# EAGLE board waga_can (EAGLE 7.7.0)
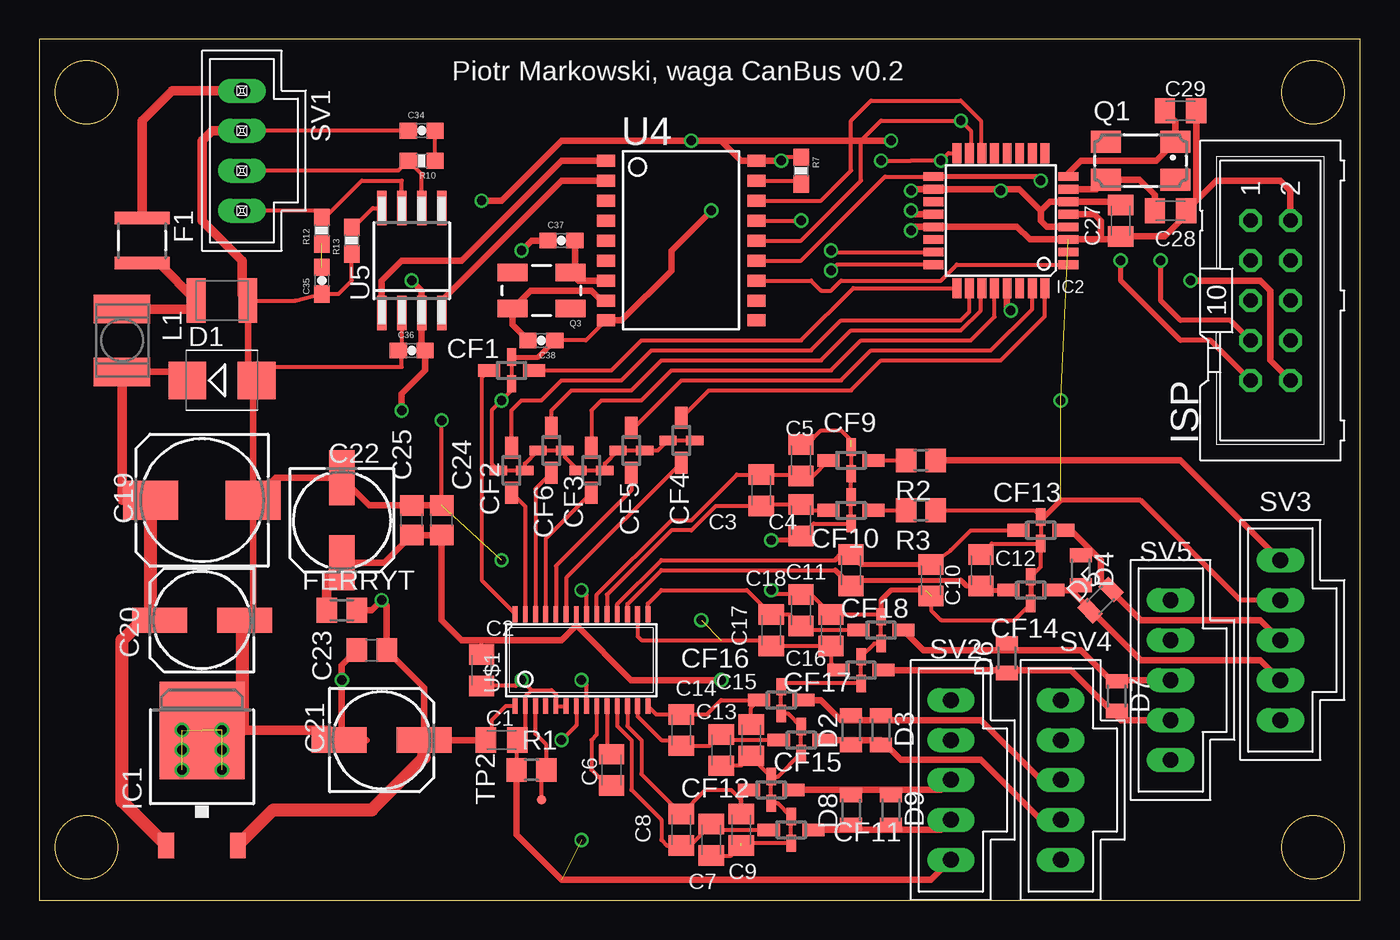
[diagram p0: board, top side]
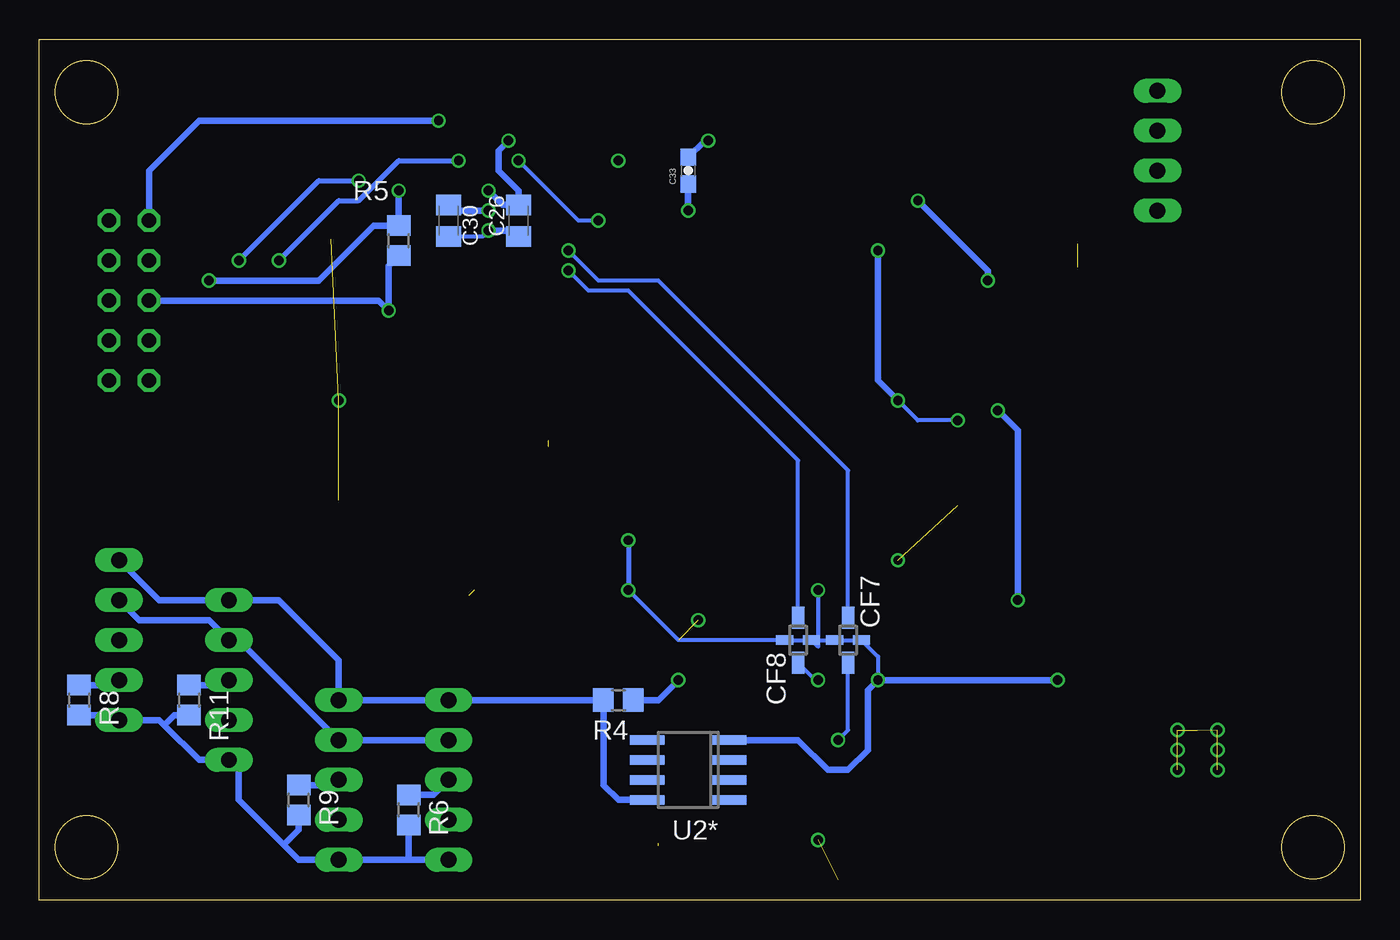
[diagram p1: board, bottom side, seen from below]

Size 84 x 54.73 mm. Coordinates in mm from the lower left corner, seen from the top.
Outline: 84,54.73 0,54.73 0,0 84,0 84,54.73
Outline: circle at 3,3.37 radius 2
Outline: circle at 81,51.37 radius 2
Outline: circle at 3,51.37 radius 2
Outline: circle at 81,3.37 radius 2
Copper layers (1*16): Top 0.035mm / dielectric 1.5mm / Bottom 0.035mm
Design rules "NOA Eagle Rule 2016-06-12": minimum track width 6mil, minimum drill 0.3mm, track to track 6mil, track to pad 6mil, pad to pad 6mil, via to via 6mil, smd to smd 0mil, copper to edge 0.4mm, drill to drill 10mil, minimum pad ring 10mil, minimum via ring 6mil, stop-mask expansion 2mil, vias tented up to drill 25mil, thermal gap 10mil

## Footprints (pad centres in the part's own frame; a part is rotated, then mirrored left to right if it is on the bottom)
CT/CN1210 = smd 1.2 x 2.8: 1 -1.65,0; 2 1.65,0
C0805K = smd 1.3 x 1.6: 1 -1,0; 2 1,0
153CLV-0810 = smd 3.5 x 2.5: + 3.25,0; - -3.25,0
153CLV-0605 = smd 3.5 x 1.6: + 2.7,0; - -2.7,0
C0805 = smd 1.3 x 1.5: 1 -0.95,0; 2 0.95,0
0603-CAP = smd 1.1 x 1: 1 -0.85,0; 2 0.85,0
NFM21C = smd 1.4 x 0.8: 1 -1.425,0; 3 1.425,0 | smd 0.6 x 1.1: 2@1 0,-0.85; 2@2 0,0.85
SMB = smd 2.4 x 2.4: A 2.2,0; C -2.2,0
MICROMELF-W = smd 0.9 x 1.4: A 0.95,0; C -0.95,0
1812X7R = smd 0.8 x 3.5: 1 -1.425,0; 2 1.425,0
M0805 = smd 1.3 x 1.6: 1 -0.95,0; 2 0.95,0
TO252 = smd 1 x 1.6: 1 -2.28,-4.8; 2 2.28,-4.8 | smd 5.4 x 6.2: 3 0,2.5
TQFP32-08 = smd 1.27 x 0.559: 1 -4.293,2.8; 2 -4.293,2; 3 -4.293,1.2; 4 -4.293,0.4; 5 -4.293,-0.4; 6 -4.293,-1.2; 7 -4.293,-2; 8 -4.293,-2.8; 17 4.293,-2.8; 18 4.293,-2; 19 4.293,-1.2; 20 4.293,-0.4; 21 4.293,0.4; 22 4.293,1.2; 23 4.293,2; 24 4.293,2.8 | smd 0.559 x 1.27: 9 -2.8,-4.293; 10 -2,-4.293; 11 -1.2,-4.293; 12 -0.4,-4.293; 13 0.4,-4.293; 14 1.2,-4.293; 15 2,-4.293; 16 2.8,-4.293; 25 2.8,4.293; 26 2,4.293; 27 1.2,4.293; 28 0.4,4.293; 29 -0.4,4.293; 30 -1.2,4.293; 31 -2,4.293; 32 -2.8,4.293
ML10 = drill 0.914 octagon: 1 -5.08,-1.27; 2 -5.08,1.27; 3 -2.54,-1.27; 4 -2.54,1.27; 5 0,-1.27; 6 0,1.27; 7 2.54,-1.27; 8 2.54,1.27; 9 5.08,-1.27; 10 5.08,1.27
L4532P = smd 1.8 x 3.6: 1 -2,0; 2 2,0
CTS406 = smd 1.9 x 1.4: 1 -2.2,-1.2; 2 2.2,-1.2; 3 2.2,1.2; 4 -2.2,1.2
CRYSTAL-SMD-5X3 = smd 1.9 x 1.1: 1 -1.85,-1.15; 2 1.85,-1.15; 3 1.85,1.15; 4 -1.85,1.15
R0805 = smd 1.3 x 1.5: 1 -0.95,0; 2 0.95,0
0603-RES = smd 1.1 x 1: 1 -0.85,0; 2 0.85,0
70543-0038 = drill 1.016 long: 1 -3.81,0; 2 -1.27,0; 3 1.27,0; 4 3.81,0
70543-0004 = drill 1.016 long: 1 -5.08,0; 2 -2.54,0; 3 0,0; 4 2.54,0; 5 5.08,0
TP06R = smd 0.6 x 0.6: TP 0,0
SO8 = smd 0.6 x 2.2: 1 -1.905,-2.6; 2 -0.635,-2.6; 3 0.635,-2.6; 4 1.905,-2.6; 5 1.905,2.6; 6 0.635,2.6; 7 -0.635,2.6; 8 -1.905,2.6
SO-18W = smd 0.762 x 1.143: 1 -5.08,-4.788; 2 -3.81,-4.788; 3 -2.54,-4.788; 4 -1.27,-4.788; 5 0,-4.788; 6 1.27,-4.788; 7 2.54,-4.788; 8 3.81,-4.788; 9 5.08,-4.788; 10 5.08,4.788; 11 3.81,4.788; 12 2.54,4.788; 13 1.27,4.788; 14 0,4.788; 15 -1.27,4.788; 16 -2.54,4.788; 17 -3.81,4.788; 18 -5.08,4.788
SO-08M = smd 0.6 x 2.2: 1 -1.905,-3.33; 2 -0.635,-3.33; 3 0.635,-3.33; 4 1.905,-3.33; 5 1.905,3.33; 6 0.635,3.33; 7 -0.635,3.33; 8 -1.905,3.33
TSSOP-28 = smd 0.305 x 0.991: 1 -4.225,-2.918; 2 -3.575,-2.918; 3 -2.925,-2.918; 4 -2.275,-2.918; 5 -1.625,-2.918; 6 -0.975,-2.918; 7 -0.325,-2.918; 8 0.325,-2.918; 9 0.975,-2.918; 10 1.625,-2.918; 11 2.275,-2.918; 12 2.925,-2.918; 13 3.575,-2.918; 14 4.225,-2.918; 15 4.225,2.918; 16 3.575,2.918; 17 2.925,2.918; 18 2.275,2.918; 19 1.625,2.918; 20 0.975,2.918; 21 0.325,2.918; 22 -0.325,2.918; 23 -0.975,2.918; 24 -1.625,2.918; 25 -2.275,2.918; 26 -2.925,2.918; 27 -3.575,2.918; 28 -4.225,2.918

## Placement (x,y rotation side)
B72530T300K62  VARISTORCN1210  [CT/CN1210]  11.62,38.13 0 top
C1  2.2uF  [C0805K]  29.4,10.19 0 top
C2  2.2uF  [C0805K]  28.13,14.63 270 top
C3  2.2uF  [C0805K]  45.91,26.06 90 top
C4  100pF  [C0805K]  48.45,24.16 90 top
C5  100pF  [C0805K]  48.45,27.97 270 top
C6  100pF  [C0805K]  36.38,8.28 90 top
C7  100pF  [C0805K]  42.73,3.84 90 top
C8  2.2uF  [C0805K]  40.83,4.47 270 top
C9  100pF  [C0805K]  44.64,4.47 90 top
C10  100pF  [C0805K]  56.7,20.35 90 top
C11  2.2uF  [C0805K]  51.62,20.98 90 top
C12  100pF  [C0805K]  59.88,20.98 270 top
C13  100pF  [C0805K]  43.37,9.55 90 top
C14  2.2uF  [C0805K]  40.83,10.82 270 top
C15  100pF  [C0805K]  45.27,10.19 90 top
C16  100pF  [C0805K]  50.35,17.17 270 top
C17  2.2uF  [C0805K]  46.54,17.17 270 top
C18  100pF  [C0805K]  48.45,18.44 270 top
C19  100uF  [153CLV-0810]  10.35,25.43 180 top
C20  10uF  [153CLV-0605]  10.35,17.81 180 top
C21  10uF  [153CLV-0605]  21.78,10.19 0 top
C22  10uF  [153CLV-0605]  19.24,24.16 270 top
C23  10pF  [C0805]  21.14,15.9 180 top
C24  100pF  [C0805]  25.59,24.16 90 top
C25  10pF  [C0805]  23.68,24.16 90 top
C26  100pF  [C0805K]  53.53,43.21 90 bottom
C27  100pF  [C0805K]  68.77,43.21 270 top
C28  20pF  [C0805K]  71.94,43.84 0 top
C29  20pF  [C0805K]  72.58,50.19 0 top
C30  100nF  [C0805K]  57.97,43.21 270 bottom
C33  0.1uF  [0603-CAP]  42.73,46.38 90 bottom
C34  560pF  [0603-CAP]  24.32,48.92 0 top
C35  560pF  [0603-CAP]  17.97,39.4 90 top
C36  0.1uF  [0603-CAP]  23.68,34.95 0 top
C37  22pF  [0603-CAP]  33.21,41.94 0 top
C38  22pF  [0603-CAP]  31.94,35.59 180 top
CF1  NFM21C  [NFM21C]  30.03,33.68 180 top
CF2  NFM21C  [NFM21C]  30.03,27.33 270 top
CF3  NFM21C  [NFM21C]  35.11,27.33 270 top
CF4  NFM21C  [NFM21C]  40.83,29.24 270 top
CF5  NFM21C  [NFM21C]  37.65,28.6 270 top
CF6  NFM21C  [NFM21C]  32.57,28.6 270 top
CF7  NFM21C  [NFM21C]  32.57,16.54 270 bottom
CF8  NFM21C  [NFM21C]  35.75,16.54 270 bottom
CF9  NFM21C  [NFM21C]  51.62,27.97 0 top
CF10  NFM21C  [NFM21C]  51.62,24.79 180 top
CF11  NFM21C  [NFM21C]  47.81,4.47 0 top
CF12  NFM21C  [NFM21C]  46.54,7.01 180 top
CF13  NFM21C  [NFM21C]  63.69,23.52 0 top
CF14  NFM21C  [NFM21C]  63.05,19.71 180 top
CF15  NFM21C  [NFM21C]  48.45,10.19 0 top
CF16  NFM21C  [NFM21C]  47.18,12.73 180 top
CF17  NFM21C  [NFM21C]  52.26,14.63 0 top
CF18  NFM21C  [NFM21C]  53.53,17.17 180 top
D1  [SMB]  11.62,33.05 0 top
D2  [MICROMELF-W]  51.62,10.82 90 top
D3  [MICROMELF-W]  53.53,10.82 270 top
D4  [MICROMELF-W]  66.23,20.98 270 top
D5  [MICROMELF-W]  67.5,19.08 45 top
D6  [MICROMELF-W]  61.53,15.39 90 top
D7  [MICROMELF-W]  68.51,12.98 270 top
D8  [MICROMELF-W]  51.62,5.74 90 top
D9  [MICROMELF-W]  54.16,5.74 270 top
F1  [1812X7R]  6.54,41.94 270 top
FERRYT  [M0805]  19.24,18.44 180 top
IC1  7812DT  [TO252]  10.35,8.28 0 top
IC2  MEGA8-AI  [TQFP32-08]  61.15,43.21 180 top
ISP  [ML10]  78.29,38.13 270 top
L1  82uH  [L4532P]  5.27,35.59 270 top
Q1  [CTS406]  70.04,47.02 180 top
Q3  16MHz  [CRYSTAL-SMD-5X3]  31.94,38.76 180 top
R1  47k  [R0805]  31.3,8.28 0 top
R2  100  [R0805]  56.07,27.97 180 top
R3  100  [R0805]  56.07,24.79 180 top
R4  0/50k*  [R0805]  47.18,12.73 180 bottom
R5  10k  [R0805]  61.15,41.94 270 bottom
R6  0R*  [R0805]  60.51,5.74 270 bottom
R7  4.7k  [0603-RES]  48.45,46.38 270 top
R8  0R*  [R0805]  81.47,12.73 270 bottom
R9  0R*  [R0805]  67.5,6.38 270 bottom
R10  100  [0603-RES]  24.32,47.02 180 top
R11  0R*  [R0805]  74.48,12.73 270 bottom
R12  100  [0603-RES]  17.97,42.57 90 top
R13  4.7k  [0603-RES]  19.87,41.94 90 top
SV1  70543-0038  [70543-0038]  12.89,47.65 270 top
SV2  70543-0004  [70543-0004]  57.97,7.65 270 top
SV3  70543-0004  [70543-0004]  78.93,16.54 270 top
SV4  70543-0004  [70543-0004]  64.96,7.65 270 top
SV5  70543-0004  [70543-0004]  71.94,14 270 top
TP2  TPTP06R  [TP06R]  31.94,6.38 90 top
U2*  REF1004  [SO8]  42.73,8.28 90 bottom
U4  MCP2515  [SO-18W]  40.83,41.94 270 top
U5  MCP2551  [SO-08M]  23.68,40.67 0 top
U$1  ADS1234  [TSSOP-28]  34.48,15.27 0 top

## Library data of the parts
B72530T300K62 = varistor
C1-C30 F1 FERRYT L1 R1-R6 R8 R9 R11 = rcl
C33-C38 Q3 R7 R10 R12 R13 = SparkFun
CF1-CF18 = murata-filter; MPN: NFM21CC102R1H3D; OC_FARNELL: 1828795; OC_NEWARK: 84R0165
D1-D9 = diode
IC1 = linear
IC2 = atmel; MPN: ATMEGA8-16AU; OC_FARNELL: 9171371; OC_NEWARK: 73M8863
ISP = con-ml; OC_FARNELL: unknown; OC_NEWARK: unknown
Q1 = crystal; OC_FARNELL: unknown; OC_NEWARK: unknown
SV1-SV5 = molex-con
TP2 = testpad
U2* = ti_ref
U4 = microchip_can
U5 = skpang_lib
U$1 = TI-ads1234

## Nets
+5V: C2.1 C22.+ C24.1 C25.1 FERRYT.2 R4.1 U$1.22
+24V: F1.1 SV1.1
A0: CF8.3 U$1.8
A1: CF6.3 U$1.26
A1N: CF12.1 D8.A D9.C R6.1 SV2.3
A1P: CF11.3 D8.C D9.A SV2.4
A2N: CF14.1 D4.A D5.C R8.1 SV3.4
A2P: CF13.3 D4.C D5.A SV3.3
A3N: CF16.1 D2.A D3.C R9.1 SV4.3
A3P: CF15.3 D2.C D3.A SV4.4
A4N: CF18.1 D6.A D7.C R11.1 SV5.3
A4P: CF17.3 D6.C D7.A SV5.4
CAN_CS: IC2.14 U4.16
CAN_INT: IC2.1 U4.12
CAN_RXD: U4.2 U5.4
CAN_TXD: U4.1 U5.1
CANH: R12.2 SV1.4 U5.7
CANL: R10.2 SV1.3 U5.6
DOUT: CF1.3 U$1.28
F_A0: CF8.1 IC2.24
F_A1: CF7.1 IC2.23
F_DOUT: CF1.1 IC2.25
F_GAIN0: CF4.1 IC2.32
F_GAIN1: CF5.1 IC2.31
F_PDWN: CF6.1 IC2.27
F_SCLK: CF2.1 IC2.26
F_SPEED: CF3.1 IC2.28
GAIN0: CF4.3 U$1.23
GAIN1: CF5.3 U$1.24
GND: B72530T300K62.2 C1.2 C2.2 C4.1 C5.1 C7.1 C9.1 C10.1 C12.1 C13.1 C15.1 C16.1 C18.1 C19.- C20.- C21.- C22.- C23.2 C24.2 C25.2 C26.1 C27.2 C28.2 C29.2 C30.2 C33.1 C34.1 C35.1 C36.1 C37.1 C38.1 CF1.2@1 CF1.2@2 CF2.2@1 CF2.2@2 CF3.2@1 CF3.2@2 CF4.2@1 CF4.2@2 CF5.2@1 CF5.2@2 CF6.2@1 CF6.2@2 CF7.2@1 CF7.2@2 CF8.2@1 CF8.2@2 CF9.2@1 CF9.2@2 CF10.2@1 CF10.2@2 CF11.2@1 CF11.2@2 CF12.2@1 CF12.2@2 CF13.2@1 CF13.2@2 CF14.2@1 CF14.2@2 CF15.2@1 CF15.2@2 CF16.2@1 CF16.2@2 CF17.2@1 CF17.2@2 CF18.2@1 CF18.2@2 D1.A IC1.3 IC2.3 IC2.5 IC2.21 ISP.2 R1.1 R3.1 R6.2 R8.2 R9.2 R11.2 R13.1 SV1.2 SV2.2 SV2.5 SV3.2 SV3.5 SV4.2 SV4.5 SV5.2 SV5.5 U2*.4 U4.9 U5.2 U$1.2 U$1.5 U$1.6 U$1.21
MISO: IC2.16 ISP.9 U4.15
MOSI: IC2.15 ISP.1 U4.14
N$1: C19.+ C20.+ D1.C IC1.1 L1.2
N$2: B72530T300K62.1 F1.2 L1.1
N$3: C30.1 IC2.20
N$5: C34.2 R10.1
N$7: CF7.3 U$1.7
N$8: C28.1 IC2.7 Q1.3
N$9: R1.2 TP2.TP U$1.3
N$10: C29.1 IC2.8 Q1.1
N$11: C3.2 C5.2 CF9.1 U$1.20
N$12: C3.1 C4.2 CF10.3 U$1.19
N$14: C14.1 C15.2 CF16.3 U$1.14
N$15: CF9.3 R2.2
N$16: CF10.1 R3.2
N$17: C6.2 U$1.10
N$18: C6.1 U$1.9
N$19: C35.2 R12.1
N$21: C7.2 C8.2 CF11.1 U$1.11
N$22: C8.1 C9.2 CF12.3 U$1.12
N$23: C10.2 C11.2 CF13.1 U$1.18
N$24: C11.1 C12.2 CF14.3 U$1.17
N$25: R13.2 U5.8
N$27: C13.2 C14.2 CF15.1 U$1.13
N$29: C38.2 Q3.3 U4.8
N$31: C37.2 Q3.1 U4.7
N$35: C16.2 C17.2 CF17.1 U$1.16
N$37: C17.1 C18.2 CF18.3 U$1.15
RS: R7.2 U4.17
RST: IC2.29 ISP.5 R5.2
SCK: IC2.17 ISP.7 U4.13
SCLK: CF2.3 U$1.27
SPEED: CF3.3 U$1.25
VDD: C1.1 C21.+ C23.1 C26.2 C27.1 C33.2 C36.2 FERRYT.1 IC1.2 IC2.4 IC2.6 IC2.18 ISP.10 R5.1 R7.1 U4.18 U5.3 U$1.1
VOUT: R2.1 R4.2 SV2.1 SV3.1 SV4.1 SV5.1 U2*.8

## Tracks (layer width: path | path; a pad name or v marks a point on that pad's centre or on a via)
+5V  (via drill 0.6)
  Top 0.254: 34.15,17.48 U$1.22 | C2.1 28.13,16.54
  Top 0.406: v43.37,14 37.64,14 34.15,17.48 33.21,16.54 28.13,16.54 26.86,16.54 25.59,17.81 C24.1 C25.1 21.93,21.46 C22.+
  Top 0.61: FERRYT.2 18.29,20.51 C22.+
  Bottom 0.406: v43.37,14 44.64,12.73 R4.1
+24V
  Top 0.61: SV1.1 8.44,51.46 6.54,49.56 F1.1
A0  (via drill 0.6)
  Top 0.254: U$1.8 34.8,13.67 v34.48,14
  Bottom 0.254: v34.48,14 34.63,14 CF8.3
A1
  Top 0.254: CF6.3 31.55,26.16 U$1.26
A1N
  Top 0.254: CF12.1 47.97,6.86
  Top 0.406: CF12.1 51.62,7.01 | 51.62,7.01 54.16,7.01 | 54.16,7.01 57.34,7.01 SV2.3 | D8.A 51.62,7.01 | D9.C 54.16,7.01
  Bottom 0.406: R6.1 58.93,6.69 SV2.3
A1P
  Top 0.406: CF11.3 51.62,4.47 | 51.62,4.47 54.16,4.47 | 54.16,4.47 57.34,4.47 SV2.4 | 53.99,4.64 54.16,4.47 | 51.79,4.64 51.62,4.47 | D9.A 54.16,4.47 | D8.C 51.62,4.47
A2N
  Top 0.406: SV3.4 77.66,15.27 70.04,15.27 66.86,18.44 | 66.86,18.44 65.59,19.71 | 65.59,19.71 CF14.1 | D4.A 65.91,20.03 65.59,19.71 | D5.C 66.86,18.44
  Bottom 0.406: R8.1 79.25,13.68 SV3.4
A2P
  Top 0.406: SV3.3 77.66,17.81 70.04,17.81 68.77,19.08 68.17,19.67 | 68.17,19.67 67.5,20.35 67.5,21.62 66.86,22.25 | 66.86,22.25 65.59,23.52 CF13.3 | D4.C 66.54,21.93 66.86,22.25 | D5.A 68.17,19.67
A3N
  Top 0.406: CF16.1 49.72,12.73 50.99,11.46 51.37,11.46 | 51.37,11.46 53.4,11.46 | 53.4,11.46 59.88,11.46 63.69,7.65 SV4.3 | D2.A 51.62,11.71 51.37,11.46 | D3.C 53.53,11.58 53.4,11.46
  Bottom 0.406: R9.1 65.28,7.33 SV4.3
A3P
  Top 0.254: CF15.3 49.87,10.03
  Top 0.406: CF15.3 51.49,10.19 | 51.49,10.19 53.53,10.19 53.84,9.87 | 53.84,9.87 54.8,8.92 59.88,8.92 63.69,5.11 SV4.4 | D3.A 53.84,9.87 | D2.C 51.62,10.06 51.49,10.19
A4N
  Top 0.406: CF18.1 56.22,15.9 61.78,15.9 | 61.78,15.9 66.23,15.9 68.13,14 68.77,14 | 68.77,14 SV5.3 | D7.C 68.7,13.93 68.77,14 | D6.A 61.53,16.15 61.78,15.9
  Bottom 0.406: R11.1 72.26,13.68 SV5.3
A4P
  Top 0.254: CF17.3 53.68,14.48
  Top 0.406: CF17.3 61.78,14.63 | 61.78,14.63 65.59,14.63 68.19,12.03 | 68.19,12.03 68.77,11.46 SV5.4 | D7.A 68.19,12.03 | D6.C 61.59,14.44 61.78,14.63
CAN_CS
  Top 0.254: U4.16 49.72,44.48 51.62,46.38 51.62,49.56 52.89,50.83 58.61,50.83 59.88,49.56 59.88,47.57 IC2.14
CAN_INT
  Top 0.254: U4.12 49.08,39.4 49.72,38.76 50.35,38.76 50.99,39.4 57.34,39.4 58.35,40.41 IC2.1
CAN_RXD
  Top 0.406: U4.2 33.21,45.75 25.59,38.13 U5.4
CAN_TXD
  Top 0.406: U4.1 33.21,47.02 26.86,40.67 23.05,40.67 21.78,39.4 U5.1
CANH
  Top 0.254: U5.7 23.05,45.75 20.51,45.75 18.18,43.42 R12.2 17.55,43.84 SV1.4
CANL
  Top 0.254: U5.6 24.32,46.17 R10.2 22.83,46.38 SV1.3
DOUT
  Top 0.254: CF1.3 28.13,33.2 28.13,20.35 30.25,18.22 U$1.28
F_A0  (via drill 0.6)
  Top 0.254: IC2.24 50.73,40.41 v50.35,40.03
  Bottom 0.254: CF8.1 35.75,27.97 46.54,38.76 49.08,38.76 v50.35,40.03
F_A1  (via drill 0.6)
  Top 0.254: v50.35,41.3 50.45,41.21 | 50.45,41.21 IC2.23 | 50.26,41.21 50.45,41.21
  Bottom 0.254: CF7.1 32.57,27.33 44.64,39.4 48.45,39.4 v50.35,41.3
F_DOUT
  Top 0.254: 31.3,33.53 CF1.1 36.38,33.68 38.29,35.59 48.45,35.59 51.77,38.91 IC2.25
F_GAIN0
  Top 0.254: IC2.32 63.95,37.12 61.15,34.32 53.53,34.32 51.62,32.41 42.58,32.41 CF4.1 40.98,30.51
F_GAIN1
  Top 0.254: CF5.1 37.81,30.03 40.83,33.05 50.99,33.05 52.89,34.95 60.51,34.95 63.15,37.59 IC2.31
F_PDWN
  Top 0.254: CF6.1 32.57,31.14 33.84,32.41 37.65,32.41 39.56,34.32 49.72,34.32 51.62,36.22 58.61,36.22 59.88,37.49 59.88,38.84 IC2.27
F_SCLK
  Top 0.254: CF2.1 30.03,31.14 30.67,31.78 31.94,31.78 33.21,33.05 37.02,33.05 38.92,34.95 49.08,34.95 50.99,36.86 58.61,36.86 59.15,37.4 IC2.26
F_SPEED
  Top 0.254: IC2.28 60.75,37.09 59.24,35.59 52.26,35.59 50.35,33.68 40.19,33.68 38.29,31.78 35.75,31.78 35.11,31.14 CF3.1
GAIN0
  Top 0.254: CF4.3 33.5,20.49 U$1.23
GAIN1
  Top 0.254: CF5.3 37.65,26.06 32.85,21.26 U$1.24
GND  (via drill 0.6)  (14 unrouted)
  Top 0.254: 31.3,13.36 30.9,12.96 U$1.2 30.9,10.69 C1.2 30.4,8.33 R1.1 | 31.3,13.36 32.57,13.36 32.85,13.08 U$1.5 U$1.6 | CF1.2@1 CF1.2@2 30.03,32.41 v29.4,31.78 28.76,31.14 28.76,27.75 CF2.2@1 CF2.2@2 30.88,27.76 CF6.2@1 CF6.2@2 33.42,28.17 CF3.2@1 CF3.2@2 35.96,27.76 CF5.2@1 CF5.2@2 39.34,28.6 CF4.2@1 CF4.2@2 | v30.67,14 31.3,13.36 | 30.35,13.68 v30.67,14 | C4.1 49.23,23.94 CF10.2@2 CF10.2@1 CF9.2@1 51.62,29.24 50.99,29.87 49.72,29.87 48.81,28.97 C5.1 48.35,28.87 | C7.1 44,2.84 C9.1 | 44.64,3.62 CF11.2@1 CF11.2@2 46.97,6.16 CF12.2@2 CF12.2@1 | CF14.2@1 63.69,21.2 CF13.2@1 | CF13.2@1 63.69,24.16 CF13.2@2 63.27,24.79 R3.1 57.34,24.47 | C12.1 60.57,22.67 CF13.2@1 | C15.1 44.64,8.55 C13.1 | 45.42,9.34 C15.1 | C15.1 45.27,9.13 CF12.2@1 | CF12.2@1 46.97,7.86 CF15.2@1 CF15.2@2 47.61,11.88 CF16.2@2 CF16.2@1 47.38,13.78 CF17.2@1 CF17.2@2 53.1,16.32 CF18.2@2 CF18.2@1 53.38,18.17 C16.1 49.08,19.44 C18.1 46.81,19.44 v46.54,19.71 | C10.1 56.7,18.44 57.34,17.81 62,17.81 CF14.2@2 | U$1.21 34.8,19.4 v34.48,19.71 | v30.67,14 30.3,13.63 C2.2 | U4.9 34.77,35.59 C38.1 | U5.2 23.05,34.74 | B72530T300K62.2 16.28,38.13 C35.1 19.02,38.55 19.87,39.4 R13.1 | D1.A 14.67,33.9 23.05,33.9 23.05,34.74 | C34.1 SV1.2 | C24.2 v25.59,30.51 | 23.05,34.74 C36.1
  Top 0.305: CF1.2@1 31.73,34.53 C38.1 | CF14.2@1 CF14.2@2 | 56.34,19.71 54.16,19.71 53.53,19.08 CF18.2@1 | SV3.2 76.39,19.08 70.04,25.43 64.96,25.43 63.69,24.16 | C4.1 48.45,22.89 v46.54,22.89
  Top 0.406: 12.89,38.13 B72530T300K62.2 13.27,33.05 13.6,33.05 | 13.6,33.05 D1.A | C19.- 13.6,33.05 | C19.- 13.6,17.81 C20.- | 20.83,10.19 19.24,10.19 | 19.24,10.19 C21.- | 67.5,42.01 68.57,42.01 C27.2 71.58,42.21 72.58,43.21 72.58,43.48 C28.2 73.58,44.48 | 67.5,42.01 IC2.3 62.98,42.01 62.18,42.81 IC2.21 55.67,42.81 v55.43,42.57 | IC2.5 67.1,43.61 67.5,43.21 67.5,42.01 | C29.2 73.58,44.48 | 19.24,10.19 v19.24,14 19.24,14.95 C23.2 | ISP.2 79.56,45.11 78.93,45.75 74.85,45.75 73.58,44.48 | R1.1 30.35,4.15 33.21,1.3 56.7,1.3 SV2.5 | C19.- 15.03,26.86 C22.- 20.99,25.11 C25.2 C24.2 | v42.73,43.84 40.19,41.3 40.19,40.03 37.02,36.86 U4.9 | C37.1 31.3,41.94 v30.67,41.3
  Top 0.61: SV1.2 10.98,48.92 10.35,48.29 10.35,43.21 12.89,40.67 12.89,38.51 B72530T300K62.2 | C21.- 18.44,10.82 12.89,10.82
  Top 0.813: IC1.3 10.39,10.82 12.89,10.82 12.89,17.1 13.6,17.81
  Bottom 0.254: C30.2 55.8,42.21 v55.43,42.57 | CF8.2@2 CF8.2@1 43.37,16.54 v46.54,19.71 | CF8.2@2 CF7.2@1 CF7.2@2 30.67,15.48 v30.67,14 | v34.48,19.71 34.48,16.12 CF8.2@2 | v25.59,30.51 28.13,30.51 v29.4,31.78
  Bottom 0.305: v46.54,22.89 v46.54,19.71
  Bottom 0.406: v55.43,42.57 53.89,42.57 C26.1 | SV2.5 60.51,2.57 | 60.51,2.57 SV4.5 67.5,2.57 68.45,3.52 | v19.24,14 v30.67,14 31.3,13.36 31.3,9.55 32.57,8.28 33.84,8.28 35.75,10.19 U2*.4 | 68.45,3.52 71.31,6.38 71.31,8.28 SV5.5 73.85,8.92 76.07,11.14 | 76.07,11.14 76.39,11.46 SV3.5 79.25,11.78 R8.2 | SV2.2 SV4.2 71.31,16.54 SV5.2 73.21,17.81 77.66,17.81 SV3.2 | C33.1 v42.73,43.84 | v30.67,41.3 30.67,33.05 v29.4,31.78 | R6.2 60.51,2.57 | R9.2 67.5,4.47 68.45,3.52 | R11.2 75.43,11.78 76.07,11.14
  other vias: 34.48,3.84 64.96,31.78 11.62,8.28 9.08,8.28 9.08,9.55 9.08,10.82 11.62,9.55 11.62,10.82 42.1,17.81 29.4,21.62
MISO  (via drill 0.6)
  Top 0.254: U4.15 v48.45,43.21 | IC2.16 57.82,47.5 v57.34,47.02 55.43,47.02 v53.53,47.02
  Top 0.305: ISP.9 74.48,35.59 72.58,35.59 68.77,39.4 v68.77,40.67
  Bottom 0.254: v48.45,43.21 49.72,43.21 v53.53,47.02
  Bottom 0.305: v68.77,40.67 64.96,44.48 63.69,44.48 61.15,47.02 v57.34,47.02
MOSI  (via drill 0.6)
  Top 0.254: U4.14 48.45,41.94 52.26,45.75 52.26,48.29 53.53,49.56 v58.61,49.56 59.24,48.92 59.24,47.59 IC2.15
  Bottom 0.406: ISP.1 77.02,46.38 73.85,49.56 v58.61,49.56
N$1
  Top 0.406: D1.C 9.42,33.59 L1.2 | 5.27,25.43 C19.+
  Top 0.61: L1.2 5.27,25.43
  Top 0.813: IC1.1 5.27,6.28 5.27,16.54 6.54,17.81 C20.+ 7.1,18.36 C19.+
N$2
  Top 0.406: 10.35,38.13 B72530T300K62.1 9.97,37.59 | F1.2 7.58,40.51
  Top 0.61: 9.97,37.59 L1.1 | 7.58,40.51 B72530T300K62.1
N$3  (via drill 0.6)
  Top 0.406: IC2.20 55.67,43.61 v55.43,43.84
  Bottom 0.406: v55.43,43.84 57.61,43.84 C30.1
N$5
  Top 0.254: R10.1 C34.2
N$7  (via drill 0.6)
  Top 0.254: U$1.7 34.15,11.13 v33.21,10.19
  Bottom 0.254: v33.21,10.19 32.57,10.82 CF7.3
N$8
  Top 0.406: IC2.7 67.23,45.21 Q1.3 69.97,45.82 70.94,44.84 C28.1
N$9
  Top 0.254: U$1.3 31.55,10.57 32.25,9.87 R1.2 31.94,7.97 TP2.TP
N$10
  Top 0.406: C29.1 72.24,49.53 Q1.1 71.04,47.02 66.23,47.02 65.44,46.23 IC2.8
N$11
  Top 0.254: CF9.1 49.2,26.97 C5.2 48.35,27.06 C3.2 44.37,27.06 41.46,24.16 40.19,24.16 35.45,19.42 U$1.20
N$12
  Top 0.254: CF10.3 48.81,24.79 C4.2 46,25.16 C3.1 43,25.06 41.46,23.52 40.19,23.52 36.1,19.43 U$1.19
N$14
  Top 0.254: C15.2 45.27,12.25 CF16.3 43.37,12.73 42.46,11.82 C14.1 39.23,11.82 U$1.14
N$15
  Top 0.254: CF9.3 R2.2
N$16
  Top 0.254: CF10.1 R3.2
N$17
  Top 0.254: U$1.10 36.1,9.56 C6.2
N$18
  Top 0.254: U$1.9 35.45,10.53 35.11,10.19 35.11,8.28 35.75,7.65 36.02,7.65 C6.1
N$19  (1 unrouted)
N$21
  Top 0.254: CF11.1 43.1,4.47 C7.2 41.37,3.47 C8.2 39.92,3.47 39.56,3.84 39.56,5.11 37.65,7.01 37.65,10.19 36.75,11.09 U$1.11
N$22
  Top 0.254: CF12.3 44.64,6.53 C9.2 44.64,6.38 44,7.01 42.37,7.01 C8.1 38.29,8.01 38.29,10.19 37.4,11.07 U$1.12
N$23
  Top 0.254: U$1.18 36.75,18.81 39.56,21.62 50.62,21.62 | C10.2 57.97,22.25 59.24,23.52 CF13.1
  Top 0.305: 50.62,21.62 50.99,21.98 C11.2 52.26,21.35 C10.2
N$24
  Top 0.254: U$1.17 37.4,18.83 39.56,20.98 50.62,20.98
  Top 0.305: 50.62,20.98 C11.1 51.99,20.35 58.61,20.35 58.97,19.98 C12.2 60.15,19.71 CF14.3
N$25
  Top 0.254: R13.2 19.93,42.73 21.2,44 U5.8
N$27
  Top 0.254: CF15.1 43.73,10.19 C13.2 42.64,9.82 C14.2 40.46,10.19 39.56,10.19 38.05,11.69 U$1.13
N$29
  Top 0.406: U4.8 35.75,38.13 35.11,38.76 31.24,38.76 Q3.3 30.09,36.59 C38.2
N$31
  Top 0.406: U4.7 34.3,39.4 Q3.1 34.06,40.18 C37.2
N$35
  Top 0.254: CF17.1 50.35,15.11 C16.2 C17.2 46.18,16.54 38.29,16.54 38.05,16.77 U$1.16
N$37
  Top 0.254: CF18.3 48.72,17.17 C18.2 47.72,18.17 C17.1 45,19.71 39.56,19.71 38.7,18.86 U$1.15
RS
  Top 0.254: U4.17 48.23,45.75 R7.2
RST  (via drill 0.6)
  Top 0.406: IC2.29 61.55,37.73 v61.78,37.49
  Bottom 0.406: R5.2 61.78,40.35 v61.78,37.49 62.42,38.13 ISP.5
SCK  (via drill 0.6)
  Top 0.254: U4.13 48.45,40.67 53.79,46.01 IC2.17
  Top 0.305: ISP.7 75.75,36.86 72.58,36.86 71.31,38.13 v71.31,40.67 | v63.69,45.75 63.43,46.01 IC2.17
  Bottom 0.305: v71.31,40.67 66.23,45.75 v63.69,45.75
SCLK
  Top 0.254: CF2.3 30.9,25.04 U$1.27
SPEED
  Top 0.254: CF3.3 32.2,23 U$1.25
VDD  (via drill 0.6)
  Top 0.254: U$1.1 29.65,12.35 28.76,11.46 28.76,10.55 C1.1 | R7.1 47.39,47.23 v47.18,47.02 | C36.2 24.53,34.53
  Top 0.406: v28.13,44.48 29.4,44.48 33.21,48.29 v41.46,48.29 43.37,48.29 | 43.37,48.29 44.64,47.02 U4.18 v47.18,47.02 | C27.1 68.57,44.41 IC2.6 64.25,44.41 63.69,43.84 | v55.43,45.11 55.53,45.21 IC2.18 61.15,45.21 | IC2.4 64.09,42.81 63.69,43.21 63.69,43.84 | 61.15,45.21 62.32,45.21 63.69,43.84 | v61.15,45.11 61.15,45.21 | v23.05,31.14 23.05,32.2 24.53,33.68 24.53,34.53 | v23.68,39.4 24.32,38.76 U5.3 24.32,35.17 C36.2 | ISP.10 78.29,34.32 78.29,38.76 77.66,39.4 v73.21,39.4 | FERRYT.1 21.14,18.44 v21.78,19.08 22.09,18.76 C23.1 24.48,13.52 C21.+ C1.1 | v54.16,48.29 43.37,48.29
  Top 0.813: IC1.2 14.89,5.74 21.14,5.74 24.48,9.08 C21.+
  Bottom 0.406: v23.68,39.4 23.68,40.03 v28.13,44.48 | v55.43,45.11 54.53,44.21 C26.2 53.53,45.11 54.8,46.38 54.8,47.65 v54.16,48.29 | v61.15,45.11 R5.1 62.74,42.89 66.23,39.4 v73.21,39.4 | v23.05,31.14 21.78,29.87 v21.78,19.08 | C33.2 41.68,48.29 v41.46,48.29
VOUT
  Top 0.406: SV3.1 72.58,27.97 R2.1
  Bottom 0.406: SV3.1 76.39,19.08 SV5.1 68.77,19.08 64.96,15.27 SV4.1 SV2.1 R4.2 48.13,7.33 47.18,6.38 U2*.8

## Text on the board
tPlace: Piotr Markowski, waga CanBus | v0.2